# EAGLE board Photon_Micro_OLED_Shield_Panel_v10 (EAGLE 7.3.0), part 1 of 2
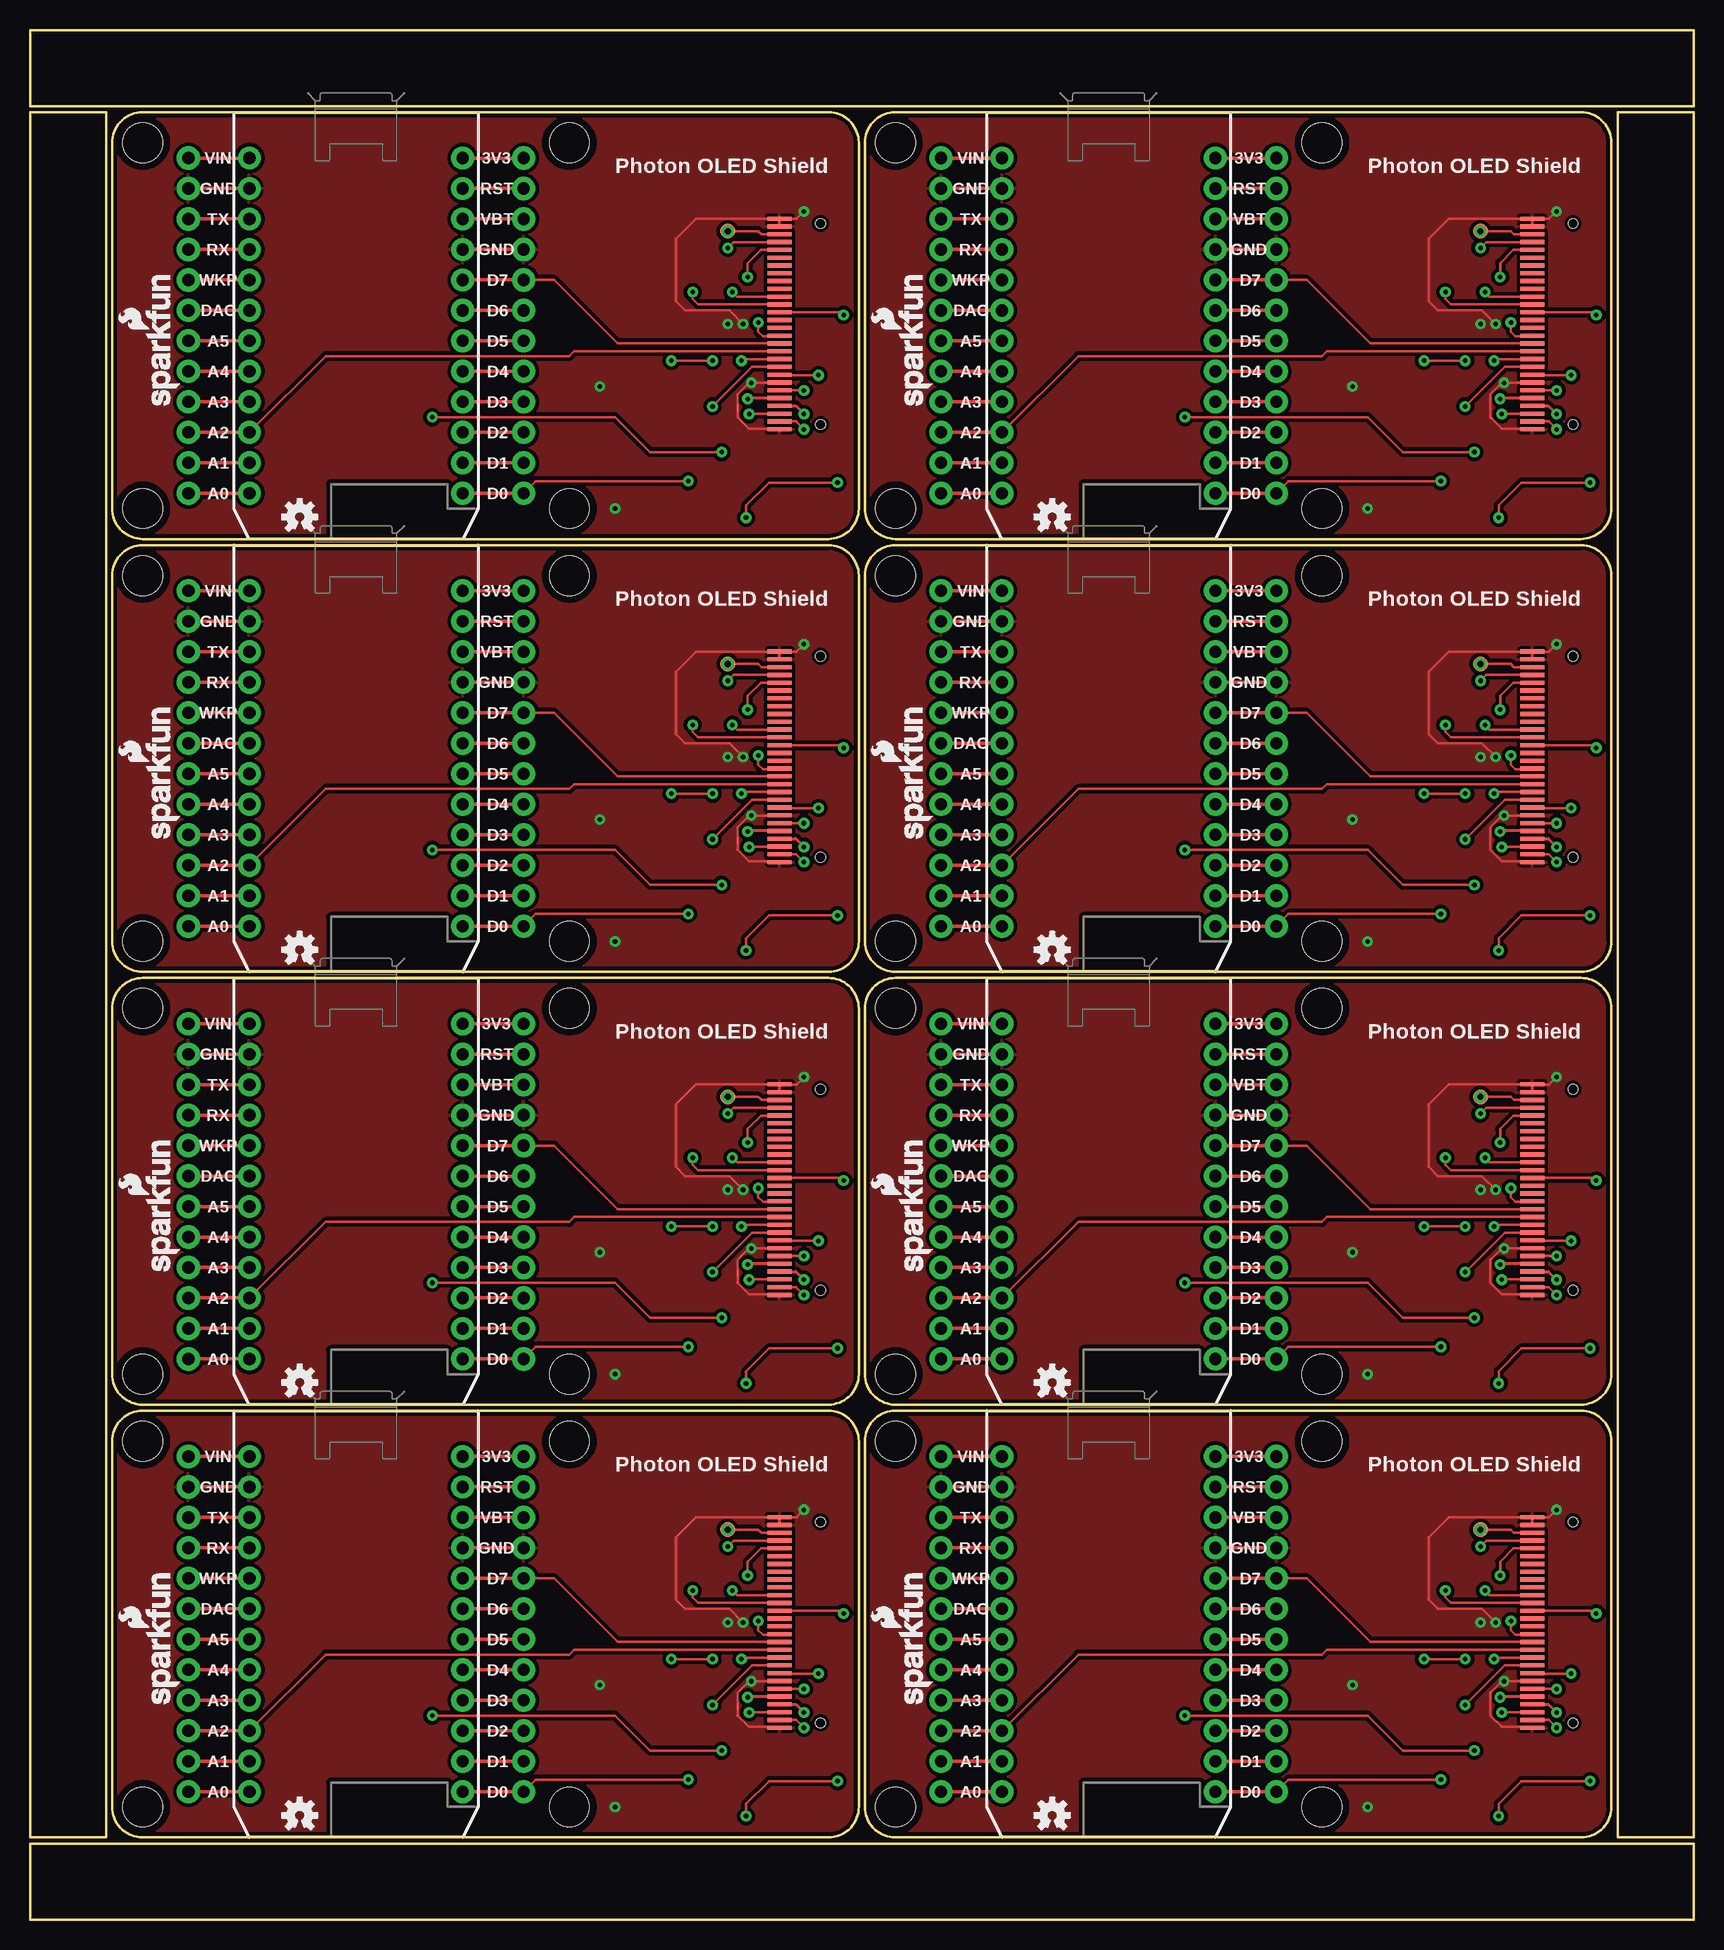
[diagram p0: board, top side]
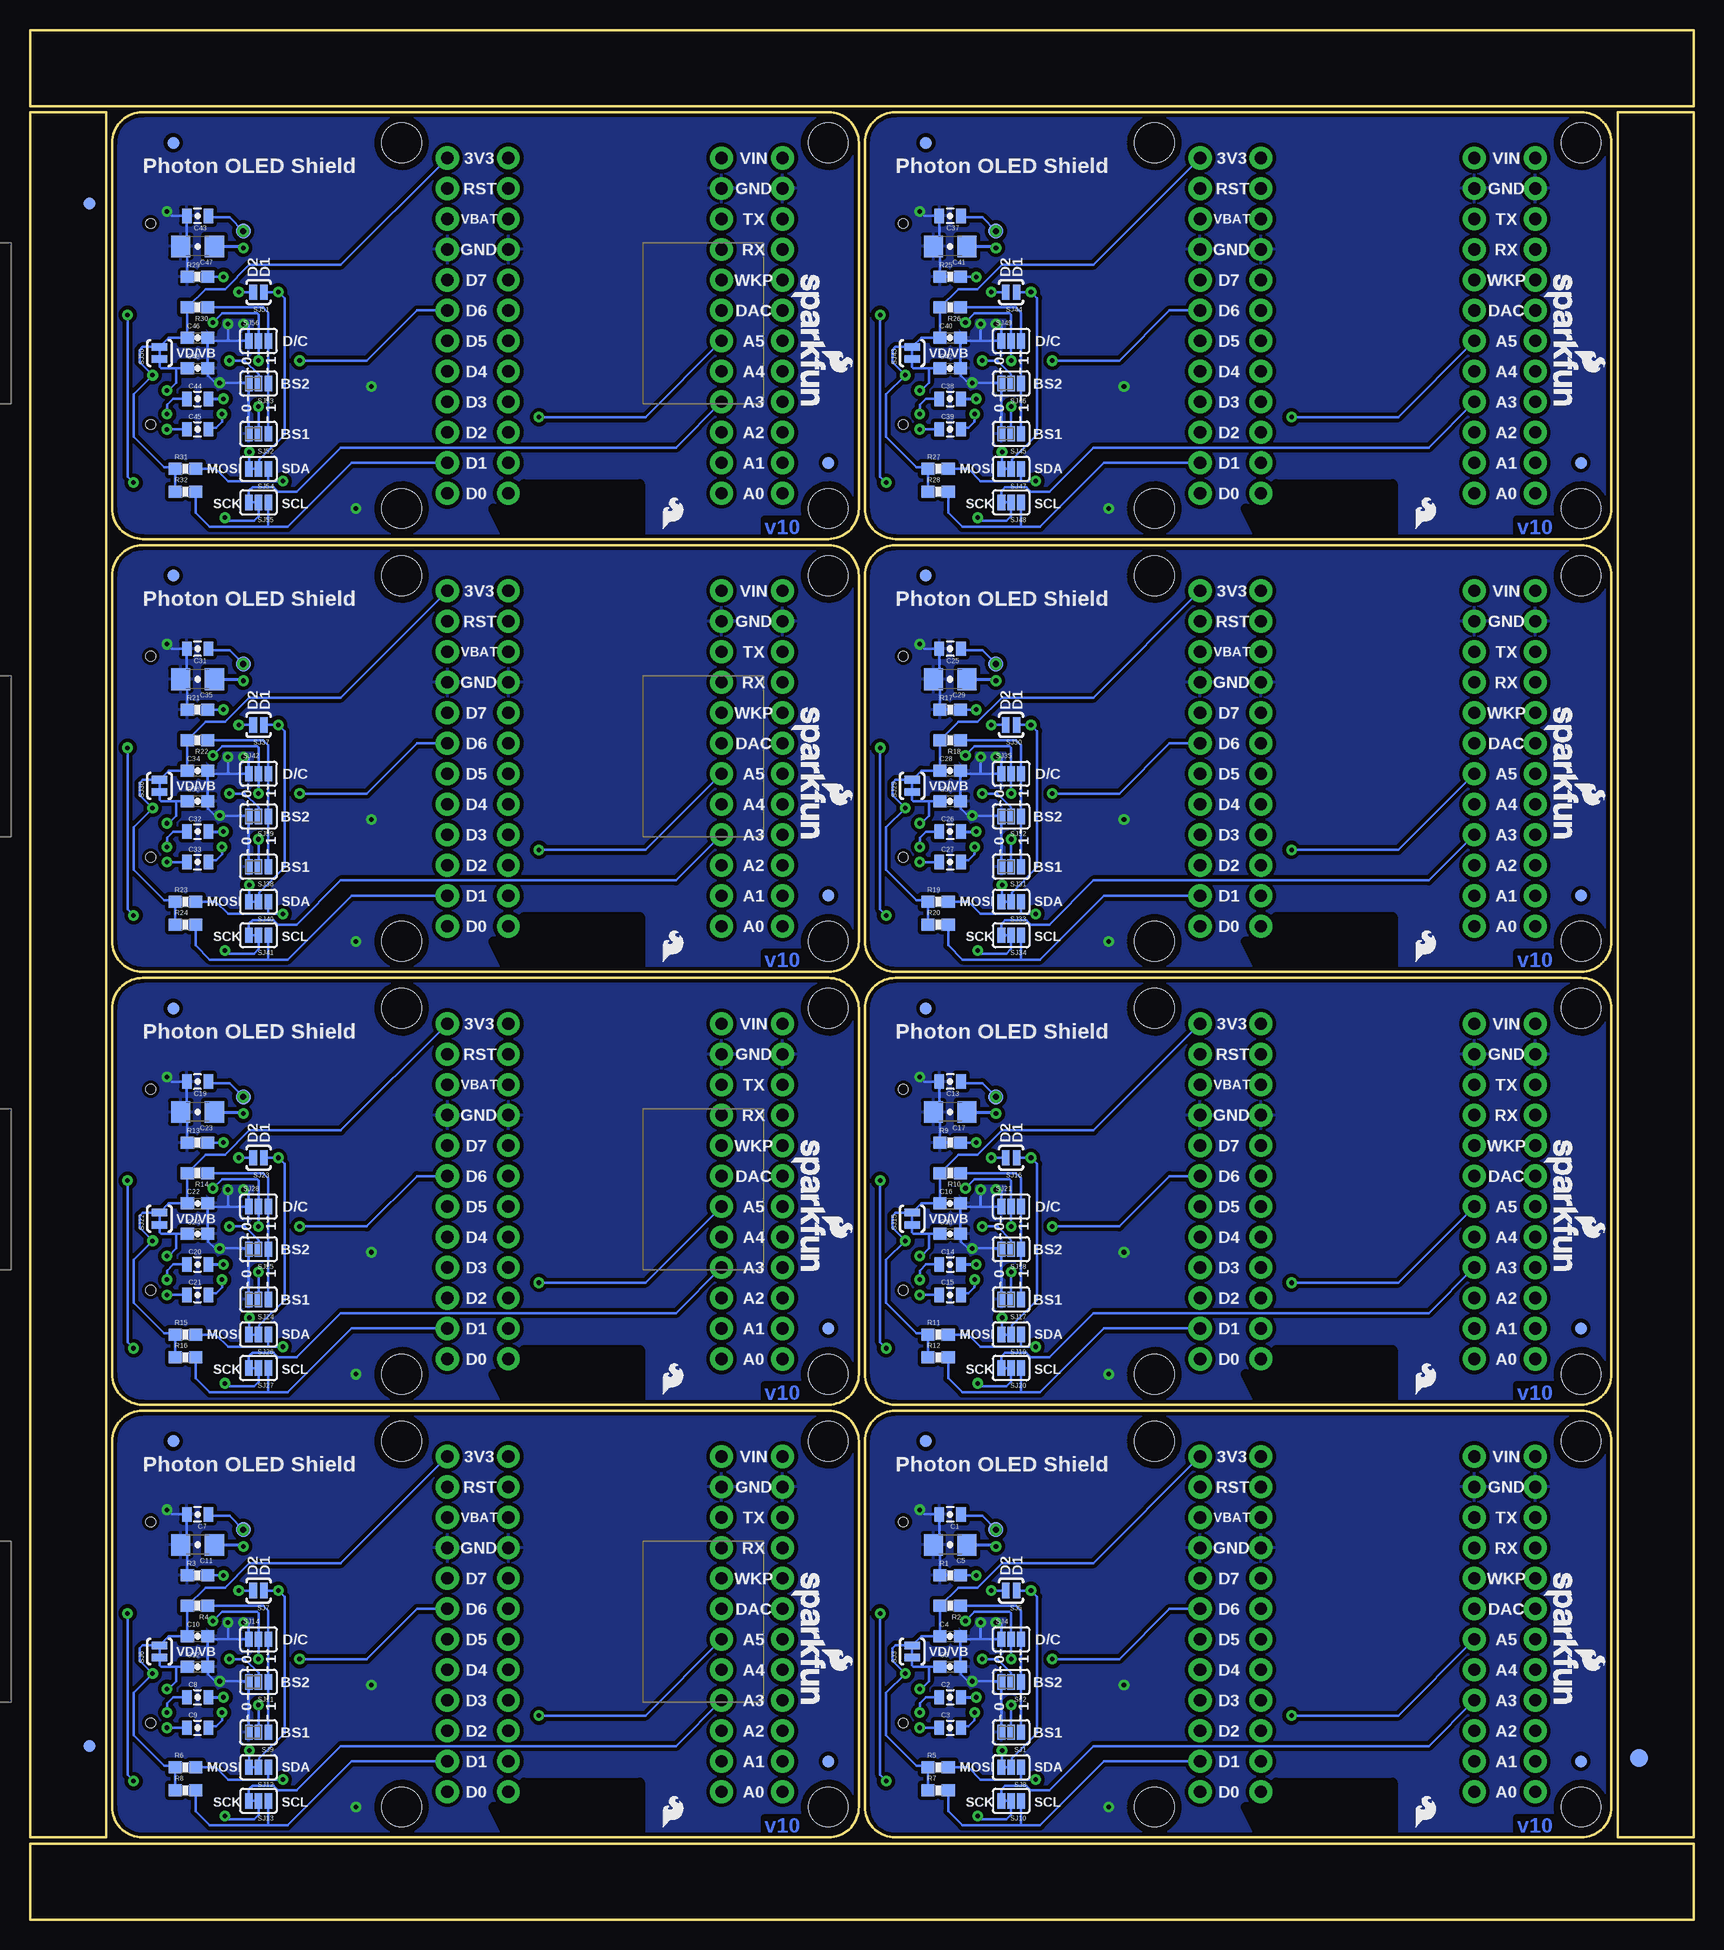
[diagram p1: board, bottom side, seen from below]

Size 138.68 x 157.48 mm. Coordinates in mm from the lower left corner, seen from the top.
Outline: 9.4,42.42 66.55,42.42 arc-90 69.09,39.88 69.09,9.4 arc-90 66.55,6.86 9.4,6.86 arc-90 6.86,9.4 6.86,39.88 arc-90 9.4,42.42
Outline: 72.14,42.42 129.29,42.42 arc-90 131.83,39.88 131.83,9.4 arc-90 129.29,6.86 72.14,6.86 arc-90 69.6,9.4 69.6,39.88 arc-90 72.14,42.42
Outline: 9.4,78.49 66.55,78.49 arc-90 69.09,75.95 69.09,45.47 arc-90 66.55,42.93 9.4,42.93 arc-90 6.86,45.47 6.86,75.95 arc-90 9.4,78.49
Outline: 72.14,78.49 129.29,78.49 arc-90 131.83,75.95 131.83,45.47 arc-90 129.29,42.93 72.14,42.93 arc-90 69.6,45.47 69.6,75.95 arc-90 72.14,78.49
Outline: 9.4,114.55 66.55,114.55 arc-90 69.09,112.01 69.09,81.53 arc-90 66.55,78.99 9.4,78.99 arc-90 6.86,81.53 6.86,112.01 arc-90 9.4,114.55
Outline: 72.14,114.55 129.29,114.55 arc-90 131.83,112.01 131.83,81.53 arc-90 129.29,78.99 72.14,78.99 arc-90 69.6,81.53 69.6,112.01 arc-90 72.14,114.55
Outline: 9.4,150.62 66.55,150.62 arc-90 69.09,148.08 69.09,117.6 arc-90 66.55,115.06 9.4,115.06 arc-90 6.86,117.6 6.86,148.08 arc-90 9.4,150.62
Outline: 72.14,150.62 129.29,150.62 arc-90 131.83,148.08 131.83,117.6 arc-90 129.29,115.06 72.14,115.06 arc-90 69.6,117.6 69.6,148.08 arc-90 72.14,150.62
Outline: 6.35,6.86 6.35,150.62 0,150.62 0,6.86 6.35,6.86
Outline: 0,0 138.68,0 138.68,6.35 0,6.35 0,0
Outline: 132.33,6.86 138.68,6.86 138.68,150.62 132.33,150.62 132.33,6.86
Outline: 138.68,157.48 0,157.48 0,151.13 138.68,151.13 138.68,157.48
Copper layers (1*16): Top 0.035mm / dielectric 1.5mm / Bottom 0.035mm
Design rules "SparkFun-2-layer": minimum track width 7mil, minimum drill 15mil, track to track 8mil, track to pad 8mil, pad to pad 8mil, via to via 8mil, smd to smd 8mil, copper to edge 8mil, drill to drill 8mil, minimum pad ring 12mil, minimum via ring 10mil, stop-mask expansion 4mil, vias tented up to drill 20mil, thermal gap 10mil

## Footprints (pad centres in the part's own frame; a part is rotated, then mirrored left to right if it is on the bottom)
0805-CAP = smd 0.8 x 1.2: 1 -0.9,0; 2 0.9,0
0603-CAP = smd 1.1 x 1: 1 -0.85,0; 2 0.85,0
1206-CAP = smd 1.6 x 1.8: 1 -1.4,0; 2 1.4,0
FIDUCIAL-1.5X3 = smd 1.5 x 1.5: 1 0,0
FIDUCIAL-1X2 = smd 1 x 1: 1 0,0
SPARK_PHOTON_TEMPLATE_WIDE = drill 1.016 pad 1.905: 1 1.27,31.75; 2 1.27,29.21; 3 1.27,26.67; 4 1.27,24.13; 5 1.27,21.59; 6 1.27,19.05; 7 1.27,16.51; 8 1.27,13.97; 9 1.27,11.43; 10 1.27,8.89; 11 1.27,6.35; 12 1.27,3.81; 13 19.05,3.81; 14 19.05,6.35; 15 19.05,8.89; 16 19.05,11.43; 17 19.05,13.97; 18 19.05,16.51; 19 19.05,19.05; 20 19.05,21.59; 21 19.05,24.13; 22 19.05,26.67; 23 19.05,29.21; 24 19.05,31.75 | drill 1.016 pad 1.93: 3V3 24.13,31.75; A0 -3.81,3.81; A1 -3.81,6.35; A2 -3.81,8.89; A3 -3.81,11.43; A4 -3.81,13.97; A5 -3.81,16.51; D0 24.13,3.81; D1 24.13,6.35; D2 24.13,8.89; D3 24.13,11.43; D4 24.13,13.97; D5 24.13,16.51; D6 24.13,19.05; D7 24.13,21.59; DAC -3.81,19.05; GND@0 -3.81,29.21; GND@2 24.13,24.13; RST 24.13,29.21; RX -3.81,24.13; TX -3.81,26.67; VBAT 24.13,26.67; VIN -3.81,31.75; WKP -3.81,21.59 | hole 3.302: -7.62,33.02; 27.94,33.02; -7.62,2.54; 27.94,2.54
OLED-0.66-64X48 = smd 0.35 x 2: 1 0,0; 2 0.65,0; 3 1.3,0; 4 1.95,0; 5 2.6,0; 6 3.25,0; 7 3.9,0; 8 4.55,0; 9 5.2,0; 10 5.85,0; 11 6.5,0; 12 7.15,0; 13 7.8,0; 14 8.45,0; 15 9.1,0; 16 9.75,0; 17 10.4,0; 18 11.05,0; 19 11.7,0; 20 12.35,0; 21 13,0; 22 13.65,0; 23 14.3,0; 24 14.95,0; 25 15.6,0; 26 16.25,0; 27 16.9,0; 28 17.55,0 | hole 0.8: 17.15,-3.4; 0.4,-3.4
0603-RES = smd 1.1 x 1: 1 -0.85,0; 2 0.85,0
PAD-JUMPER-3-2OF3_NC_BY_PASTE_YES_SILK_FULL_BOX = smd 0.635 x 1.27: 1 -0.813,0; 2 0,0; 3 0.813,0
PAD-JUMPER-2-NC_BY_TRACE_YES_SILK = smd 0.635 x 1.27: 1 -0.508,0; 2 0.508,0
PAD-JUMPER-3-NO_YES_SILK = smd 0.635 x 1.27: 1 -0.813,0; 2 0,0; 3 0.813,0
PAD-JUMPER-2-NO_YES_SILK = smd 0.635 x 1.27: 1 -0.45,0; 2 0.45,0
PAD-JUMPER-3-2OF3_NC_BY_TRACE_YES_SILK_FULL_BOX = smd 0.635 x 1.27: 1 -0.813,0; 2 0,0; 3 0.813,0
PAD.03X.05 = smd 1.27 x 1.27: P$1 0,0

## Placement (x,y rotation side)
C1  2.2uF  [0805-CAP]  61.98,33.78 180 bottom
C2  1uF  [0805-CAP]  61.98,18.54 0 bottom
C3  1uF  [0805-CAP]  61.98,16 0 bottom
C4  1uF  [0603-CAP]  61.98,23.62 0 bottom
C5  4.7uF  [1206-CAP]  61.98,31.24 180 bottom
C6  1uF  [0603-CAP]  61.98,21.08 0 bottom
C7  2.2uF  [0805-CAP]  124.71,33.78 180 bottom
C8  1uF  [0805-CAP]  124.71,18.54 0 bottom
C9  1uF  [0805-CAP]  124.71,16 0 bottom
C10  1uF  [0603-CAP]  124.71,23.62 0 bottom
C11  4.7uF  [1206-CAP]  124.71,31.24 180 bottom
C12  1uF  [0603-CAP]  124.71,21.08 0 bottom
C13  2.2uF  [0805-CAP]  61.98,69.85 180 bottom
C14  1uF  [0805-CAP]  61.98,54.61 0 bottom
C15  1uF  [0805-CAP]  61.98,52.07 0 bottom
C16  1uF  [0603-CAP]  61.98,59.69 0 bottom
C17  4.7uF  [1206-CAP]  61.98,67.31 180 bottom
C18  1uF  [0603-CAP]  61.98,57.15 0 bottom
C19  2.2uF  [0805-CAP]  124.71,69.85 180 bottom
C20  1uF  [0805-CAP]  124.71,54.61 0 bottom
C21  1uF  [0805-CAP]  124.71,52.07 0 bottom
C22  1uF  [0603-CAP]  124.71,59.69 0 bottom
C23  4.7uF  [1206-CAP]  124.71,67.31 180 bottom
C24  1uF  [0603-CAP]  124.71,57.15 0 bottom
C25  2.2uF  [0805-CAP]  61.98,105.92 180 bottom
C26  1uF  [0805-CAP]  61.98,90.68 0 bottom
C27  1uF  [0805-CAP]  61.98,88.14 0 bottom
C28  1uF  [0603-CAP]  61.98,95.76 0 bottom
C29  4.7uF  [1206-CAP]  61.98,103.38 180 bottom
C30  1uF  [0603-CAP]  61.98,93.22 0 bottom
C31  2.2uF  [0805-CAP]  124.71,105.92 180 bottom
C32  1uF  [0805-CAP]  124.71,90.68 0 bottom
C33  1uF  [0805-CAP]  124.71,88.14 0 bottom
C34  1uF  [0603-CAP]  124.71,95.76 0 bottom
C35  4.7uF  [1206-CAP]  124.71,103.38 180 bottom
C36  1uF  [0603-CAP]  124.71,93.22 0 bottom
C37  2.2uF  [0805-CAP]  61.98,141.99 180 bottom
C38  1uF  [0805-CAP]  61.98,126.75 0 bottom
C39  1uF  [0805-CAP]  61.98,124.21 0 bottom
C40  1uF  [0603-CAP]  61.98,131.83 0 bottom
C41  4.7uF  [1206-CAP]  61.98,139.45 180 bottom
C42  1uF  [0603-CAP]  61.98,129.29 0 bottom
C43  2.2uF  [0805-CAP]  124.71,141.99 180 bottom
C44  1uF  [0805-CAP]  124.71,126.75 0 bottom
C45  1uF  [0805-CAP]  124.71,124.21 0 bottom
C46  1uF  [0603-CAP]  124.71,131.83 0 bottom
C47  4.7uF  [1206-CAP]  124.71,139.45 180 bottom
C48  1uF  [0603-CAP]  124.71,129.29 0 bottom
E$1  [FIDUCIAL-1.5X3]  4.57,13.46 0 bottom
E$4  [FIDUCIAL-1X2]  133.73,14.48 0 bottom
E$5  [FIDUCIAL-1X2]  133.73,143 180 bottom
FID1  FIDUCIAL1X2  [FIDUCIAL-1X2]  9.4,13.21 270 bottom
FID2  FIDUCIAL1X2  [FIDUCIAL-1X2]  64.01,39.88 270 bottom
FID3  FIDUCIAL1X2  [FIDUCIAL-1X2]  72.14,13.21 270 bottom
FID4  FIDUCIAL1X2  [FIDUCIAL-1X2]  126.75,39.88 270 bottom
FID5  FIDUCIAL1X2  [FIDUCIAL-1X2]  9.4,49.28 270 bottom
FID6  FIDUCIAL1X2  [FIDUCIAL-1X2]  64.01,75.95 270 bottom
FID7  FIDUCIAL1X2  [FIDUCIAL-1X2]  72.14,49.28 270 bottom
FID8  FIDUCIAL1X2  [FIDUCIAL-1X2]  126.75,75.95 270 bottom
FID9  FIDUCIAL1X2  [FIDUCIAL-1X2]  9.4,85.34 270 bottom
FID10  FIDUCIAL1X2  [FIDUCIAL-1X2]  64.01,112.01 270 bottom
FID11  FIDUCIAL1X2  [FIDUCIAL-1X2]  72.14,85.34 270 bottom
FID12  FIDUCIAL1X2  [FIDUCIAL-1X2]  126.75,112.01 270 bottom
FID13  FIDUCIAL1X2  [FIDUCIAL-1X2]  9.4,121.41 270 bottom
FID14  FIDUCIAL1X2  [FIDUCIAL-1X2]  64.01,148.08 270 bottom
FID15  FIDUCIAL1X2  [FIDUCIAL-1X2]  72.14,121.41 270 bottom
FID16  FIDUCIAL1X2  [FIDUCIAL-1X2]  126.75,148.08 270 bottom
JP1  SPARK_PHOTONTEMPLATE_WIDE  [SPARK_PHOTON_TEMPLATE_WIDE]  79.76,6.86 0 top
JP2  SPARK_PHOTONTEMPLATE_WIDE  [SPARK_PHOTON_TEMPLATE_WIDE]  17.02,42.93 0 top
JP3  SPARK_PHOTONTEMPLATE_WIDE  [SPARK_PHOTON_TEMPLATE_WIDE]  17.02,6.86 0 top
JP4  SPARK_PHOTONTEMPLATE_WIDE  [SPARK_PHOTON_TEMPLATE_WIDE]  79.76,42.93 0 top
JP5  SPARK_PHOTONTEMPLATE_WIDE  [SPARK_PHOTON_TEMPLATE_WIDE]  17.02,78.99 0 top
JP6  SPARK_PHOTONTEMPLATE_WIDE  [SPARK_PHOTON_TEMPLATE_WIDE]  79.76,78.99 0 top
JP7  SPARK_PHOTONTEMPLATE_WIDE  [SPARK_PHOTON_TEMPLATE_WIDE]  17.02,115.06 0 top
JP8  SPARK_PHOTONTEMPLATE_WIDE  [SPARK_PHOTON_TEMPLATE_WIDE]  79.76,115.06 0 top
LOGO1  SFE_LOGO_NAME_FLAME.1_INCH  [SFE_LOGO_NAME_FLAME_.1]  12.57,17.53 90 top
LOGO2  SFE_LOGO_NAME_FLAME.1_INCH  [SFE_LOGO_NAME_FLAME_.1]  12.57,29.34 270 bottom
LOGO3  OSHW-LOGOS  [OSHW-LOGO-S]  22.48,8.7 0 top
LOGO4  OSHW-LOGOS  [OSHW-LOGO-S]  85.22,8.7 0 top
LOGO5  SFE_LOGO_NAME_FLAME.1_INCH  [SFE_LOGO_NAME_FLAME_.1]  75.31,17.53 90 top
LOGO6  SFE_LOGO_NAME_FLAME.1_INCH  [SFE_LOGO_NAME_FLAME_.1]  75.31,29.34 270 bottom
LOGO7  OSHW-LOGOS  [OSHW-LOGO-S]  22.48,44.77 0 top
LOGO8  SFE_LOGO_NAME_FLAME.1_INCH  [SFE_LOGO_NAME_FLAME_.1]  12.57,53.59 90 top
LOGO9  SFE_LOGO_NAME_FLAME.1_INCH  [SFE_LOGO_NAME_FLAME_.1]  12.57,65.41 270 bottom
LOGO10  OSHW-LOGOS  [OSHW-LOGO-S]  85.22,44.77 0 top
LOGO11  SFE_LOGO_NAME_FLAME.1_INCH  [SFE_LOGO_NAME_FLAME_.1]  75.31,53.59 90 top
LOGO12  SFE_LOGO_NAME_FLAME.1_INCH  [SFE_LOGO_NAME_FLAME_.1]  75.31,65.41 270 bottom
LOGO13  OSHW-LOGOS  [OSHW-LOGO-S]  22.48,80.84 0 top
LOGO14  SFE_LOGO_NAME_FLAME.1_INCH  [SFE_LOGO_NAME_FLAME_.1]  12.57,89.66 90 top
LOGO15  SFE_LOGO_NAME_FLAME.1_INCH  [SFE_LOGO_NAME_FLAME_.1]  12.57,101.47 270 bottom
LOGO16  OSHW-LOGOS  [OSHW-LOGO-S]  85.22,80.84 0 top
LOGO17  SFE_LOGO_NAME_FLAME.1_INCH  [SFE_LOGO_NAME_FLAME_.1]  75.31,89.66 90 top
LOGO18  SFE_LOGO_NAME_FLAME.1_INCH  [SFE_LOGO_NAME_FLAME_.1]  75.31,101.47 270 bottom
LOGO19  OSHW-LOGOS  [OSHW-LOGO-S]  22.48,116.9 0 top
LOGO20  SFE_LOGO_NAME_FLAME.1_INCH  [SFE_LOGO_NAME_FLAME_.1]  12.57,125.73 90 top
LOGO21  SFE_LOGO_NAME_FLAME.1_INCH  [SFE_LOGO_NAME_FLAME_.1]  12.57,137.54 270 bottom
LOGO22  OSHW-LOGOS  [OSHW-LOGO-S]  85.22,116.9 0 top
LOGO23  SFE_LOGO_NAME_FLAME.1_INCH  [SFE_LOGO_NAME_FLAME_.1]  75.31,125.73 90 top
LOGO24  SFE_LOGO_NAME_FLAME.1_INCH  [SFE_LOGO_NAME_FLAME_.1]  75.31,137.54 270 bottom
OLED1  OLED0.66  [OLED-0.66-64X48]  62.48,16 90 top
OLED2  OLED0.66  [OLED-0.66-64X48]  125.22,16 90 top
OLED3  OLED0.66  [OLED-0.66-64X48]  62.48,52.07 90 top
OLED4  OLED0.66  [OLED-0.66-64X48]  125.22,52.07 90 top
OLED5  OLED0.66  [OLED-0.66-64X48]  62.48,88.14 90 top
OLED6  OLED0.66  [OLED-0.66-64X48]  125.22,88.14 90 top
OLED7  OLED0.66  [OLED-0.66-64X48]  62.48,124.21 90 top
OLED8  OLED0.66  [OLED-0.66-64X48]  125.22,124.21 90 top
R1  390k  [0603-RES]  61.98,28.7 0 bottom
R2  10k  [0603-RES]  61.98,26.16 180 bottom
R3  390k  [0603-RES]  124.71,28.7 0 bottom
R4  10k  [0603-RES]  124.71,26.16 180 bottom
R5  10K  [0603-RES]  62.99,12.7 0 bottom
R6  10K  [0603-RES]  125.73,12.7 0 bottom
R7  10K  [0603-RES]  62.99,10.79 0 bottom
R8  10K  [0603-RES]  125.73,10.79 0 bottom
R9  390k  [0603-RES]  61.98,64.77 0 bottom
R10  10k  [0603-RES]  61.98,62.23 180 bottom
R11  10K  [0603-RES]  62.99,48.77 0 bottom
R12  10K  [0603-RES]  62.99,46.86 0 bottom
R13  390k  [0603-RES]  124.71,64.77 0 bottom
R14  10k  [0603-RES]  124.71,62.23 180 bottom
R15  10K  [0603-RES]  125.73,48.77 0 bottom
R16  10K  [0603-RES]  125.73,46.86 0 bottom
R17  390k  [0603-RES]  61.98,100.84 0 bottom
R18  10k  [0603-RES]  61.98,98.3 180 bottom
R19  10K  [0603-RES]  62.99,84.84 0 bottom
R20  10K  [0603-RES]  62.99,82.93 0 bottom
R21  390k  [0603-RES]  124.71,100.84 0 bottom
R22  10k  [0603-RES]  124.71,98.3 180 bottom
R23  10K  [0603-RES]  125.73,84.84 0 bottom
R24  10K  [0603-RES]  125.73,82.93 0 bottom
R25  390k  [0603-RES]  61.98,136.91 0 bottom
R26  10k  [0603-RES]  61.98,134.37 180 bottom
R27  10K  [0603-RES]  62.99,120.9 0 bottom
R28  10K  [0603-RES]  62.99,119 0 bottom
R29  390k  [0603-RES]  124.71,136.91 0 bottom
R30  10k  [0603-RES]  124.71,134.37 180 bottom
R31  10K  [0603-RES]  125.73,120.9 0 bottom
R32  10K  [0603-RES]  125.73,119 0 bottom
SJ1  BS1  [PAD-JUMPER-3-2OF3_NC_BY_PASTE_YES_SILK_FULL_BOX]  56.9,15.62 180 bottom
SJ2  BS2  [PAD-JUMPER-3-2OF3_NC_BY_PASTE_YES_SILK_FULL_BOX]  56.9,19.81 180 bottom
SJ3  [PAD-JUMPER-2-NC_BY_TRACE_YES_SILK]  65.15,22.35 90 bottom
SJ4  [PAD-JUMPER-3-NO_YES_SILK]  56.9,23.37 0 bottom
SJ5  [PAD-JUMPER-2-NO_YES_SILK]  56.9,27.43 180 bottom
SJ6  [PAD-JUMPER-2-NC_BY_TRACE_YES_SILK]  127.89,22.35 90 bottom
SJ7  [PAD-JUMPER-2-NO_YES_SILK]  119.63,27.43 180 bottom
SJ8  [PAD-JUMPER-3-2OF3_NC_BY_TRACE_YES_SILK_FULL_BOX]  56.9,12.7 180 bottom
SJ9  BS1  [PAD-JUMPER-3-2OF3_NC_BY_PASTE_YES_SILK_FULL_BOX]  119.63,15.62 180 bottom
SJ10  [PAD-JUMPER-3-2OF3_NC_BY_TRACE_YES_SILK_FULL_BOX]  56.9,9.91 180 bottom
SJ11  BS2  [PAD-JUMPER-3-2OF3_NC_BY_PASTE_YES_SILK_FULL_BOX]  119.63,19.81 180 bottom
SJ12  [PAD-JUMPER-3-2OF3_NC_BY_TRACE_YES_SILK_FULL_BOX]  119.63,12.7 180 bottom
SJ13  [PAD-JUMPER-3-2OF3_NC_BY_TRACE_YES_SILK_FULL_BOX]  119.63,9.91 180 bottom
SJ14  [PAD-JUMPER-3-NO_YES_SILK]  119.63,23.37 0 bottom
SJ15  [PAD-JUMPER-2-NC_BY_TRACE_YES_SILK]  65.15,58.42 90 bottom
SJ16  [PAD-JUMPER-2-NO_YES_SILK]  56.9,63.5 180 bottom
SJ17  BS1  [PAD-JUMPER-3-2OF3_NC_BY_PASTE_YES_SILK_FULL_BOX]  56.9,51.69 180 bottom
SJ18  BS2  [PAD-JUMPER-3-2OF3_NC_BY_PASTE_YES_SILK_FULL_BOX]  56.9,55.88 180 bottom
SJ19  [PAD-JUMPER-3-2OF3_NC_BY_TRACE_YES_SILK_FULL_BOX]  56.9,48.77 180 bottom
SJ20  [PAD-JUMPER-3-2OF3_NC_BY_TRACE_YES_SILK_FULL_BOX]  56.9,45.97 180 bottom
SJ21  [PAD-JUMPER-3-NO_YES_SILK]  56.9,59.44 0 bottom
SJ22  [PAD-JUMPER-2-NC_BY_TRACE_YES_SILK]  127.89,58.42 90 bottom
SJ23  [PAD-JUMPER-2-NO_YES_SILK]  119.63,63.5 180 bottom
SJ24  BS1  [PAD-JUMPER-3-2OF3_NC_BY_PASTE_YES_SILK_FULL_BOX]  119.63,51.69 180 bottom
SJ25  BS2  [PAD-JUMPER-3-2OF3_NC_BY_PASTE_YES_SILK_FULL_BOX]  119.63,55.88 180 bottom
SJ26  [PAD-JUMPER-3-2OF3_NC_BY_TRACE_YES_SILK_FULL_BOX]  119.63,48.77 180 bottom
SJ27  [PAD-JUMPER-3-2OF3_NC_BY_TRACE_YES_SILK_FULL_BOX]  119.63,45.97 180 bottom
SJ28  [PAD-JUMPER-3-NO_YES_SILK]  119.63,59.44 0 bottom
SJ29  [PAD-JUMPER-2-NC_BY_TRACE_YES_SILK]  65.15,94.49 90 bottom
SJ30  [PAD-JUMPER-2-NO_YES_SILK]  56.9,99.57 180 bottom
SJ31  BS1  [PAD-JUMPER-3-2OF3_NC_BY_PASTE_YES_SILK_FULL_BOX]  56.9,87.76 180 bottom
SJ32  BS2  [PAD-JUMPER-3-2OF3_NC_BY_PASTE_YES_SILK_FULL_BOX]  56.9,91.95 180 bottom
SJ33  [PAD-JUMPER-3-2OF3_NC_BY_TRACE_YES_SILK_FULL_BOX]  56.9,84.84 180 bottom
SJ34  [PAD-JUMPER-3-2OF3_NC_BY_TRACE_YES_SILK_FULL_BOX]  56.9,82.04 180 bottom
SJ35  [PAD-JUMPER-3-NO_YES_SILK]  56.9,95.5 0 bottom
SJ36  [PAD-JUMPER-2-NC_BY_TRACE_YES_SILK]  127.89,94.49 90 bottom
SJ37  [PAD-JUMPER-2-NO_YES_SILK]  119.63,99.57 180 bottom
SJ38  BS1  [PAD-JUMPER-3-2OF3_NC_BY_PASTE_YES_SILK_FULL_BOX]  119.63,87.76 180 bottom
SJ39  BS2  [PAD-JUMPER-3-2OF3_NC_BY_PASTE_YES_SILK_FULL_BOX]  119.63,91.95 180 bottom
SJ40  [PAD-JUMPER-3-2OF3_NC_BY_TRACE_YES_SILK_FULL_BOX]  119.63,84.84 180 bottom
SJ41  [PAD-JUMPER-3-2OF3_NC_BY_TRACE_YES_SILK_FULL_BOX]  119.63,82.04 180 bottom
SJ42  [PAD-JUMPER-3-NO_YES_SILK]  119.63,95.5 0 bottom
SJ43  [PAD-JUMPER-2-NC_BY_TRACE_YES_SILK]  65.15,130.56 90 bottom
SJ44  [PAD-JUMPER-2-NO_YES_SILK]  56.9,135.64 180 bottom
SJ45  BS1  [PAD-JUMPER-3-2OF3_NC_BY_PASTE_YES_SILK_FULL_BOX]  56.9,123.83 180 bottom
SJ46  BS2  [PAD-JUMPER-3-2OF3_NC_BY_PASTE_YES_SILK_FULL_BOX]  56.9,128.02 180 bottom
SJ47  [PAD-JUMPER-3-2OF3_NC_BY_TRACE_YES_SILK_FULL_BOX]  56.9,120.9 180 bottom
SJ48  [PAD-JUMPER-3-2OF3_NC_BY_TRACE_YES_SILK_FULL_BOX]  56.9,118.11 180 bottom
SJ49  [PAD-JUMPER-3-NO_YES_SILK]  56.9,131.57 0 bottom
SJ50  [PAD-JUMPER-2-NC_BY_TRACE_YES_SILK]  127.89,130.56 90 bottom
SJ51  [PAD-JUMPER-2-NO_YES_SILK]  119.63,135.64 180 bottom
SJ52  BS1  [PAD-JUMPER-3-2OF3_NC_BY_PASTE_YES_SILK_FULL_BOX]  119.63,123.83 180 bottom
SJ53  BS2  [PAD-JUMPER-3-2OF3_NC_BY_PASTE_YES_SILK_FULL_BOX]  119.63,128.02 180 bottom
SJ54  [PAD-JUMPER-3-2OF3_NC_BY_TRACE_YES_SILK_FULL_BOX]  119.63,120.9 180 bottom
SJ55  [PAD-JUMPER-3-2OF3_NC_BY_TRACE_YES_SILK_FULL_BOX]  119.63,118.11 180 bottom
SJ56  [PAD-JUMPER-3-NO_YES_SILK]  119.63,131.57 0 bottom
TP1  TEST-POINT3X5  [PAD.03X.05]  58.17,32.51 270 bottom
TP2  TEST-POINT3X5  [PAD.03X.05]  58.17,32.51 90 top
TP3  TEST-POINT3X5  [PAD.03X.05]  120.9,32.51 270 bottom
TP4  TEST-POINT3X5  [PAD.03X.05]  120.9,32.51 90 top
TP5  TEST-POINT3X5  [PAD.03X.05]  58.17,68.58 270 bottom
TP6  TEST-POINT3X5  [PAD.03X.05]  58.17,68.58 90 top
TP7  TEST-POINT3X5  [PAD.03X.05]  120.9,68.58 270 bottom
TP8  TEST-POINT3X5  [PAD.03X.05]  120.9,68.58 90 top
TP9  TEST-POINT3X5  [PAD.03X.05]  58.17,104.65 270 bottom
TP10  TEST-POINT3X5  [PAD.03X.05]  58.17,104.65 90 top
TP11  TEST-POINT3X5  [PAD.03X.05]  120.9,104.65 270 bottom
TP12  TEST-POINT3X5  [PAD.03X.05]  120.9,104.65 90 top
TP13  TEST-POINT3X5  [PAD.03X.05]  58.17,140.72 270 bottom
TP14  TEST-POINT3X5  [PAD.03X.05]  58.17,140.72 90 top
TP15  TEST-POINT3X5  [PAD.03X.05]  120.9,140.72 270 bottom
TP16  TEST-POINT3X5  [PAD.03X.05]  120.9,140.72 90 top
U$1  [SFE_LOGO_FLAME_.1]  23.5,7.37 0 bottom
U$2  [SFE_LOGO_FLAME_.1]  86.23,7.37 0 bottom
U$3  [SFE_LOGO_FLAME_.1]  23.5,43.43 0 bottom
U$4  [SFE_LOGO_FLAME_.1]  86.23,43.43 0 bottom
U$5  [SFE_LOGO_FLAME_.1]  23.5,79.5 0 bottom
U$6  [SFE_LOGO_FLAME_.1]  86.23,79.5 0 bottom
U$7  [SFE_LOGO_FLAME_.1]  23.5,115.57 0 bottom
U$8  [SFE_LOGO_FLAME_.1]  86.23,115.57 0 bottom

## Library data of the parts
C1 C7 C13 C19 C25 C31 C37 C43 = SparkFun-Capacitors; PROD_ID: CAP-11624
C2 C3 C8 C9 C14 C15 C20 C21 C26 C27 C32 C33 C38 C39 C44 C45 = SparkFun-Capacitors
C4 C6 C10 C12 C16 C18 C22 C24 C28 C30 C34 C36 C40 C42 C46 C48 = SparkFun-Passives; PROD_ID: CAP-00868
C5 C11 C17 C23 C29 C35 C41 C47 = SparkFun-Capacitors; PROD_ID: CAP-10300
E$1 = SparkFun-Retired
E$4 E$5 FID1-FID16 LOGO1-LOGO24 U$1-U$8 = SparkFun-Aesthetics
JP1-JP8 = template_temp
OLED1-OLED8 = microView-temp; PROD_ID: LCD-12019
R1 R3 R9 R13 R17 R21 R25 R29 = SparkFun-Passives; PROD_ID: RES-12024
R2 R4 R10 R14 R18 R22 R26 R30 = SparkFun-Passives; PROD_ID: RES-00824
R5-R8 R11 R12 R15 R16 R19 R20 R23 R24 R27 R28 R31 R32 = SparkFun-Resistors; PROD_ID: RES-00824
SJ1-SJ56 TP1-TP16 = SparkFun-Passives

## Nets
BS1: OLED1.9 SJ1.2
BS2: OLED1.10 SJ2.2
BS3: OLED2.9 SJ9.2
BS4: OLED2.10 SJ11.2
BS5: OLED3.9 SJ17.2
BS6: OLED3.10 SJ18.2
BS7: OLED4.9 SJ24.2
BS8: OLED4.10 SJ25.2
BS9: OLED5.9 SJ31.2
BS10: OLED5.10 SJ32.2
BS11: OLED6.9 SJ38.2
BS12: OLED6.10 SJ39.2
BS13: OLED7.9 SJ45.2
BS14: OLED7.10 SJ46.2
BS15: OLED8.9 SJ52.2
BS16: OLED8.10 SJ53.2
C1N: C2.2 OLED1.5
C1N1: C8.2 OLED2.5
C1N2: C14.2 OLED3.5
C1N3: C20.2 OLED4.5
C1N4: C26.2 OLED5.5
C1N5: C32.2 OLED6.5
C1N6: C38.2 OLED7.5
C1N7: C44.2 OLED8.5
C1P: C2.1 OLED1.4
C1P1: C8.1 OLED2.4
C1P2: C14.1 OLED3.4
C1P3: C20.1 OLED4.4
C1P4: C26.1 OLED5.4
C1P5: C32.1 OLED6.4
C1P6: C38.1 OLED7.4
C1P7: C44.1 OLED8.4
C2N: C3.2 OLED1.3
C2N1: C9.2 OLED2.3
C2N2: C15.2 OLED3.3
C2N3: C21.2 OLED4.3
C2N4: C27.2 OLED5.3
C2N5: C33.2 OLED6.3
C2N6: C39.2 OLED7.3
C2N7: C45.2 OLED8.3
C2P: C3.1 OLED1.2
C2P1: C9.1 OLED2.2
C2P2: C15.1 OLED3.2
C2P3: C21.1 OLED4.2
C2P4: C27.1 OLED5.2
C2P5: C33.1 OLED6.2
C2P6: C39.1 OLED7.2
C2P7: C45.1 OLED8.2
D0/SCK: OLED1.16 SJ10.2
D0/SCK1: OLED2.16 SJ13.2
D0/SCK2: OLED3.16 SJ20.2
D0/SCK3: OLED4.16 SJ27.2
D0/SCK4: OLED5.16 SJ34.2
D0/SCK5: OLED6.16 SJ41.2
D0/SCK6: OLED7.16 SJ48.2
D0/SCK7: OLED8.16 SJ55.2
D0/SDA: JP3.13 JP3.D0 R5.2 SJ8.1
D0/SDA1: JP1.13 JP1.D0 R6.2 SJ12.1
D0/SDA2: JP2.13 JP2.D0 R11.2 SJ19.1
D0/SDA3: JP4.13 JP4.D0 R15.2 SJ26.1
D0/SDA4: JP5.13 JP5.D0 R19.2 SJ33.1
D0/SDA5: JP6.13 JP6.D0 R23.2 SJ40.1
D0/SDA6: JP7.13 JP7.D0 R27.2 SJ47.1
D0/SDA7: JP8.13 JP8.D0 R31.2 SJ54.1
D1: JP1.20 JP1.D7 OLED2.12
D1/MOSI: OLED1.17 SJ5.1 SJ8.2
D1/MOSI1: OLED2.17 SJ7.1 SJ12.2
D1/MOSI2: OLED3.17 SJ16.1 SJ19.2
D1/MOSI3: OLED4.17 SJ23.1 SJ26.2
D1/MOSI4: OLED5.17 SJ30.1 SJ33.2
D1/MOSI5: OLED6.17 SJ37.1 SJ40.2
D1/MOSI6: OLED7.17 SJ44.1 SJ47.2
D1/MOSI7: OLED8.17 SJ51.1 SJ54.2
D1/SCL: JP3.14 JP3.D1 R7.2 SJ10.1
D1/SCL1: JP1.14 JP1.D1 R8.2 SJ13.1
D1/SCL2: JP2.14 JP2.D1 R12.2 SJ20.1
D1/SCL3: JP4.14 JP4.D1 R16.2 SJ27.1
D1/SCL4: JP5.14 JP5.D1 R20.2 SJ34.1
D1/SCL5: JP6.14 JP6.D1 R24.2 SJ41.1
D1/SCL6: JP7.14 JP7.D1 R28.2 SJ48.1
D1/SCL7: JP8.14 JP8.D1 R32.2 SJ55.1
D2: JP3.15 JP3.D2
D2/MISO: OLED1.18 SJ5.2
D2/MISO1: OLED2.18 SJ7.2
D2/MISO2: OLED3.18 SJ16.2
D2/MISO3: OLED4.18 SJ23.2
D2/MISO4: OLED5.18 SJ30.2
D2/MISO5: OLED6.18 SJ37.2
D2/MISO6: OLED7.18 SJ44.2
D2/MISO7: OLED8.18 SJ51.2
D3: JP3.16 JP3.D3
D4: JP3.17 JP3.D4
D5: JP3.18 JP3.D5
D6: JP3.19 JP3.D6 OLED1.13 SJ4.2
D7: JP3.20 JP3.D7 OLED1.12
D8: JP1.19 JP1.D6 OLED2.13 SJ14.2
D9: JP1.18 JP1.D5
D10: JP1.17 JP1.D4
D11: JP1.15 JP1.D2
D12: JP1.16 JP1.D3
D13: JP2.20 JP2.D7 OLED3.12
D14: JP2.19 JP2.D6 OLED3.13 SJ21.2
D15: JP2.18 JP2.D5
D16: JP2.17 JP2.D4
D17: JP2.15 JP2.D2
D18: JP2.16 JP2.D3
D19: JP4.20 JP4.D7 OLED4.12
D20: JP4.19 JP4.D6 OLED4.13 SJ28.2
D21: JP4.18 JP4.D5
D22: JP4.17 JP4.D4
D23: JP4.15 JP4.D2
D24: JP4.16 JP4.D3
D25: JP5.20 JP5.D7 OLED5.12
D26: JP5.19 JP5.D6 OLED5.13 SJ35.2
D27: JP5.18 JP5.D5
D28: JP5.17 JP5.D4
D29: JP5.15 JP5.D2
D30: JP5.16 JP5.D3
D31: JP6.20 JP6.D7 OLED6.12
D32: JP6.19 JP6.D6 OLED6.13 SJ42.2
D33: JP6.18 JP6.D5
D34: JP6.17 JP6.D4
D35: JP6.15 JP6.D2
D36: JP6.16 JP6.D3
D37: JP7.20 JP7.D7 OLED7.12
D38: JP7.19 JP7.D6 OLED7.13 SJ49.2
D39: JP7.18 JP7.D5
D40: JP7.17 JP7.D4
D41: JP7.15 JP7.D2
D42: JP7.16 JP7.D3
D43: JP8.20 JP8.D7 OLED8.12
D44: JP8.19 JP8.D6 OLED8.13 SJ56.2
D45: JP8.18 JP8.D5
D46: JP8.17 JP8.D4
D47: JP8.15 JP8.D2
D48: JP8.16 JP8.D3
GND: C1.2 C4.2 C5.2 C6.2 JP3.2 JP3.21 JP3.GND@0 JP3.GND@2 OLED1.1 OLED1.7 OLED1.27 OLED1.28 R1.1 SJ1.3 SJ2.3 SJ4.1
GND1: C7.2 C10.2 C11.2 C12.2 JP1.2 JP1.21 JP1.GND@0 JP1.GND@2 OLED2.1 OLED2.7 OLED2.27 OLED2.28 R3.1 SJ9.3 SJ11.3 SJ14.1
GND2: C13.2 C16.2 C17.2 C18.2 JP2.2 JP2.21 JP2.GND@0 JP2.GND@2 OLED3.1 OLED3.7 OLED3.27 OLED3.28 R9.1 SJ17.3 SJ18.3 SJ21.1
GND3: C19.2 C22.2 C23.2 C24.2 JP4.2 JP4.21 JP4.GND@0 JP4.GND@2 OLED4.1 OLED4.7 OLED4.27 OLED4.28 R13.1 SJ24.3 SJ25.3 SJ28.1
GND4: C25.2 C28.2 C29.2 C30.2 JP5.2 JP5.21 JP5.GND@0 JP5.GND@2 OLED5.1 OLED5.7 OLED5.27 OLED5.28 R17.1 SJ31.3 SJ32.3 SJ35.1
GND5: C31.2 C34.2 C35.2 C36.2 JP6.2 JP6.21 JP6.GND@0 JP6.GND@2 OLED6.1 OLED6.7 OLED6.27 OLED6.28 R21.1 SJ38.3 SJ39.3 SJ42.1
GND6: C37.2 C40.2 C41.2 C42.2 JP7.2 JP7.21 JP7.GND@0 JP7.GND@2 OLED7.1 OLED7.7 OLED7.27 OLED7.28 R25.1 SJ45.3 SJ46.3 SJ49.1
GND7: C43.2 C46.2 C47.2 C48.2 JP8.2 JP8.21 JP8.GND@0 JP8.GND@2 OLED8.1 OLED8.7 OLED8.27 OLED8.28 R29.1 SJ52.3 SJ53.3 SJ56.1
IREF: OLED1.24 R1.2
IREF1: OLED2.24 R3.2
IREF2: OLED3.24 R9.2
IREF3: OLED4.24 R13.2
IREF4: OLED5.24 R17.2
IREF5: OLED6.24 R21.2
IREF6: OLED7.24 R25.2
IREF7: OLED8.24 R29.2
MISO: JP3.8 JP3.A4
MISO1: JP1.8 JP1.A4
MISO2: JP2.8 JP2.A4
MISO3: JP4.8 JP4.A4
MISO4: JP5.8 JP5.A4
MISO5: JP6.8 JP6.A4
MISO6: JP7.8 JP7.A4
MISO7: JP8.8 JP8.A4
MOSI: JP3.7 JP3.A5 SJ8.3
MOSI1: JP1.7 JP1.A5 SJ12.3
MOSI2: JP2.7 JP2.A5 SJ19.3
MOSI3: JP4.7 JP4.A5 SJ26.3
MOSI4: JP5.7 JP5.A5 SJ33.3
MOSI5: JP6.7 JP6.A5 SJ40.3
MOSI6: JP7.7 JP7.A5 SJ47.3
MOSI7: JP8.7 JP8.A5 SJ54.3
RESET: JP3.23 JP3.RST
RESET1: JP1.23 JP1.RST
RESET2: JP2.23 JP2.RST
RESET3: JP4.23 JP4.RST
RESET4: JP5.23 JP5.RST
RESET5: JP6.23 JP6.RST
RESET6: JP7.23 JP7.RST
RESET7: JP8.23 JP8.RST
SCK: JP3.9 JP3.A3 SJ10.3
SCK1: JP1.9 JP1.A3 SJ13.3
SCK2: JP2.9 JP2.A3 SJ20.3
SCK3: JP4.9 JP4.A3 SJ27.3
SCK4: JP5.9 JP5.A3 SJ34.3
SCK5: JP6.9 JP6.A3 SJ41.3
SCK6: JP7.9 JP7.A3 SJ48.3
SCK7: JP8.9 JP8.A3 SJ55.3
SS: JP3.10 JP3.A2 OLED1.11
SS1: JP1.10 JP1.A2 OLED2.11
SS2: JP2.10 JP2.A2 OLED3.11
SS3: JP4.10 JP4.A2 OLED4.11
SS4: JP5.10 JP5.A2 OLED5.11
SS5: JP6.10 JP6.A2 OLED6.11
SS6: JP7.10 JP7.A2 OLED7.11
SS7: JP8.10 JP8.A2 OLED8.11
VBAT: C6.1 OLED1.6 SJ3.1
VBAT1: C12.1 OLED2.6 SJ6.1
VBAT2: C18.1 OLED3.6 SJ15.1
VBAT3: C24.1 OLED4.6 SJ22.1
VBAT4: C30.1 OLED5.6 SJ29.1
VBAT5: C36.1 OLED6.6 SJ36.1
VBAT6: C42.1 OLED7.6 SJ43.1
VBAT7: C48.1 OLED8.6 SJ50.1
VBAT_PHOTON: JP3.22 JP3.VBAT
VBAT_PHOTON1: JP1.22 JP1.VBAT
VBAT_PHOTON2: JP2.22 JP2.VBAT
VBAT_PHOTON3: JP4.22 JP4.VBAT
VBAT_PHOTON4: JP5.22 JP5.VBAT
VBAT_PHOTON5: JP6.22 JP6.VBAT
VBAT_PHOTON6: JP7.22 JP7.VBAT
VBAT_PHOTON7: JP8.22 JP8.VBAT
VCC: C1.1 OLED1.26 TP1.P$1 TP2.P$1
VCC1: C7.1 OLED2.26 TP3.P$1 TP4.P$1
VCC2: C13.1 OLED3.26 TP5.P$1 TP6.P$1
VCC3: C19.1 OLED4.26 TP7.P$1 TP8.P$1
VCC4: C25.1 OLED5.26 TP9.P$1 TP10.P$1
VCC5: C31.1 OLED6.26 TP11.P$1 TP12.P$1
VCC6: C37.1 OLED7.26 TP13.P$1 TP14.P$1
VCC7: C43.1 OLED8.26 TP15.P$1 TP16.P$1
VCOMH: C5.1 OLED1.25
VCOMH1: C11.1 OLED2.25
VCOMH2: C17.1 OLED3.25
VCOMH3: C23.1 OLED4.25
VCOMH4: C29.1 OLED5.25
VCOMH5: C35.1 OLED6.25
VCOMH6: C41.1 OLED7.25
VCOMH7: C47.1 OLED8.25
VDD: C4.1 JP3.3V3 JP3.24 OLED1.8 R2.2 R5.1 R7.1 SJ3.2
VDD1: C10.1 JP1.3V3 JP1.24 OLED2.8 R4.2 R6.1 R8.1 SJ6.2
VDD2: C16.1 JP2.3V3 JP2.24 OLED3.8 R10.2 R11.1 R12.1 SJ15.2
VDD3: C22.1 JP4.3V3 JP4.24 OLED4.8 R14.2 R15.1 R16.1 SJ22.2
VDD4: C28.1 JP5.3V3 JP5.24 OLED5.8 R18.2 R19.1 R20.1 SJ29.2
VDD5: C34.1 JP6.3V3 JP6.24 OLED6.8 R22.2 R23.1 R24.1 SJ36.2
VDD6: C40.1 JP7.3V3 JP7.24 OLED7.8 R26.2 R27.1 R28.1 SJ43.2
VDD7: C46.1 JP8.3V3 JP8.24 OLED8.8 R30.2 R31.1 R32.1 SJ50.2
VDD_PU: R2.1 SJ1.1 SJ2.1 SJ4.3
VDD_PU1: R4.1 SJ9.1 SJ11.1 SJ14.3
VDD_PU2: R10.1 SJ17.1 SJ18.1 SJ21.3
VDD_PU3: R14.1 SJ24.1 SJ25.1 SJ28.3
VDD_PU4: R18.1 SJ31.1 SJ32.1 SJ35.3
VDD_PU5: R22.1 SJ38.1 SJ39.1 SJ42.3
VDD_PU6: R26.1 SJ45.1 SJ46.1 SJ49.3
VDD_PU7: R30.1 SJ52.1 SJ53.1 SJ56.3